# Altium PCB UKU100_001.PcbDoc (part 1 of 3)
Units mm, origin at the board's own origin, x right, y up, seen from the top; angles counter-clockwise.
Board outline 319.2 x 161.95 mm, 2 copper layers (Top Layer, Bottom Layer); 250 components, 337 nets, 871 pads, 490 vias.
Unrouted connection lines stored in the file: 3.
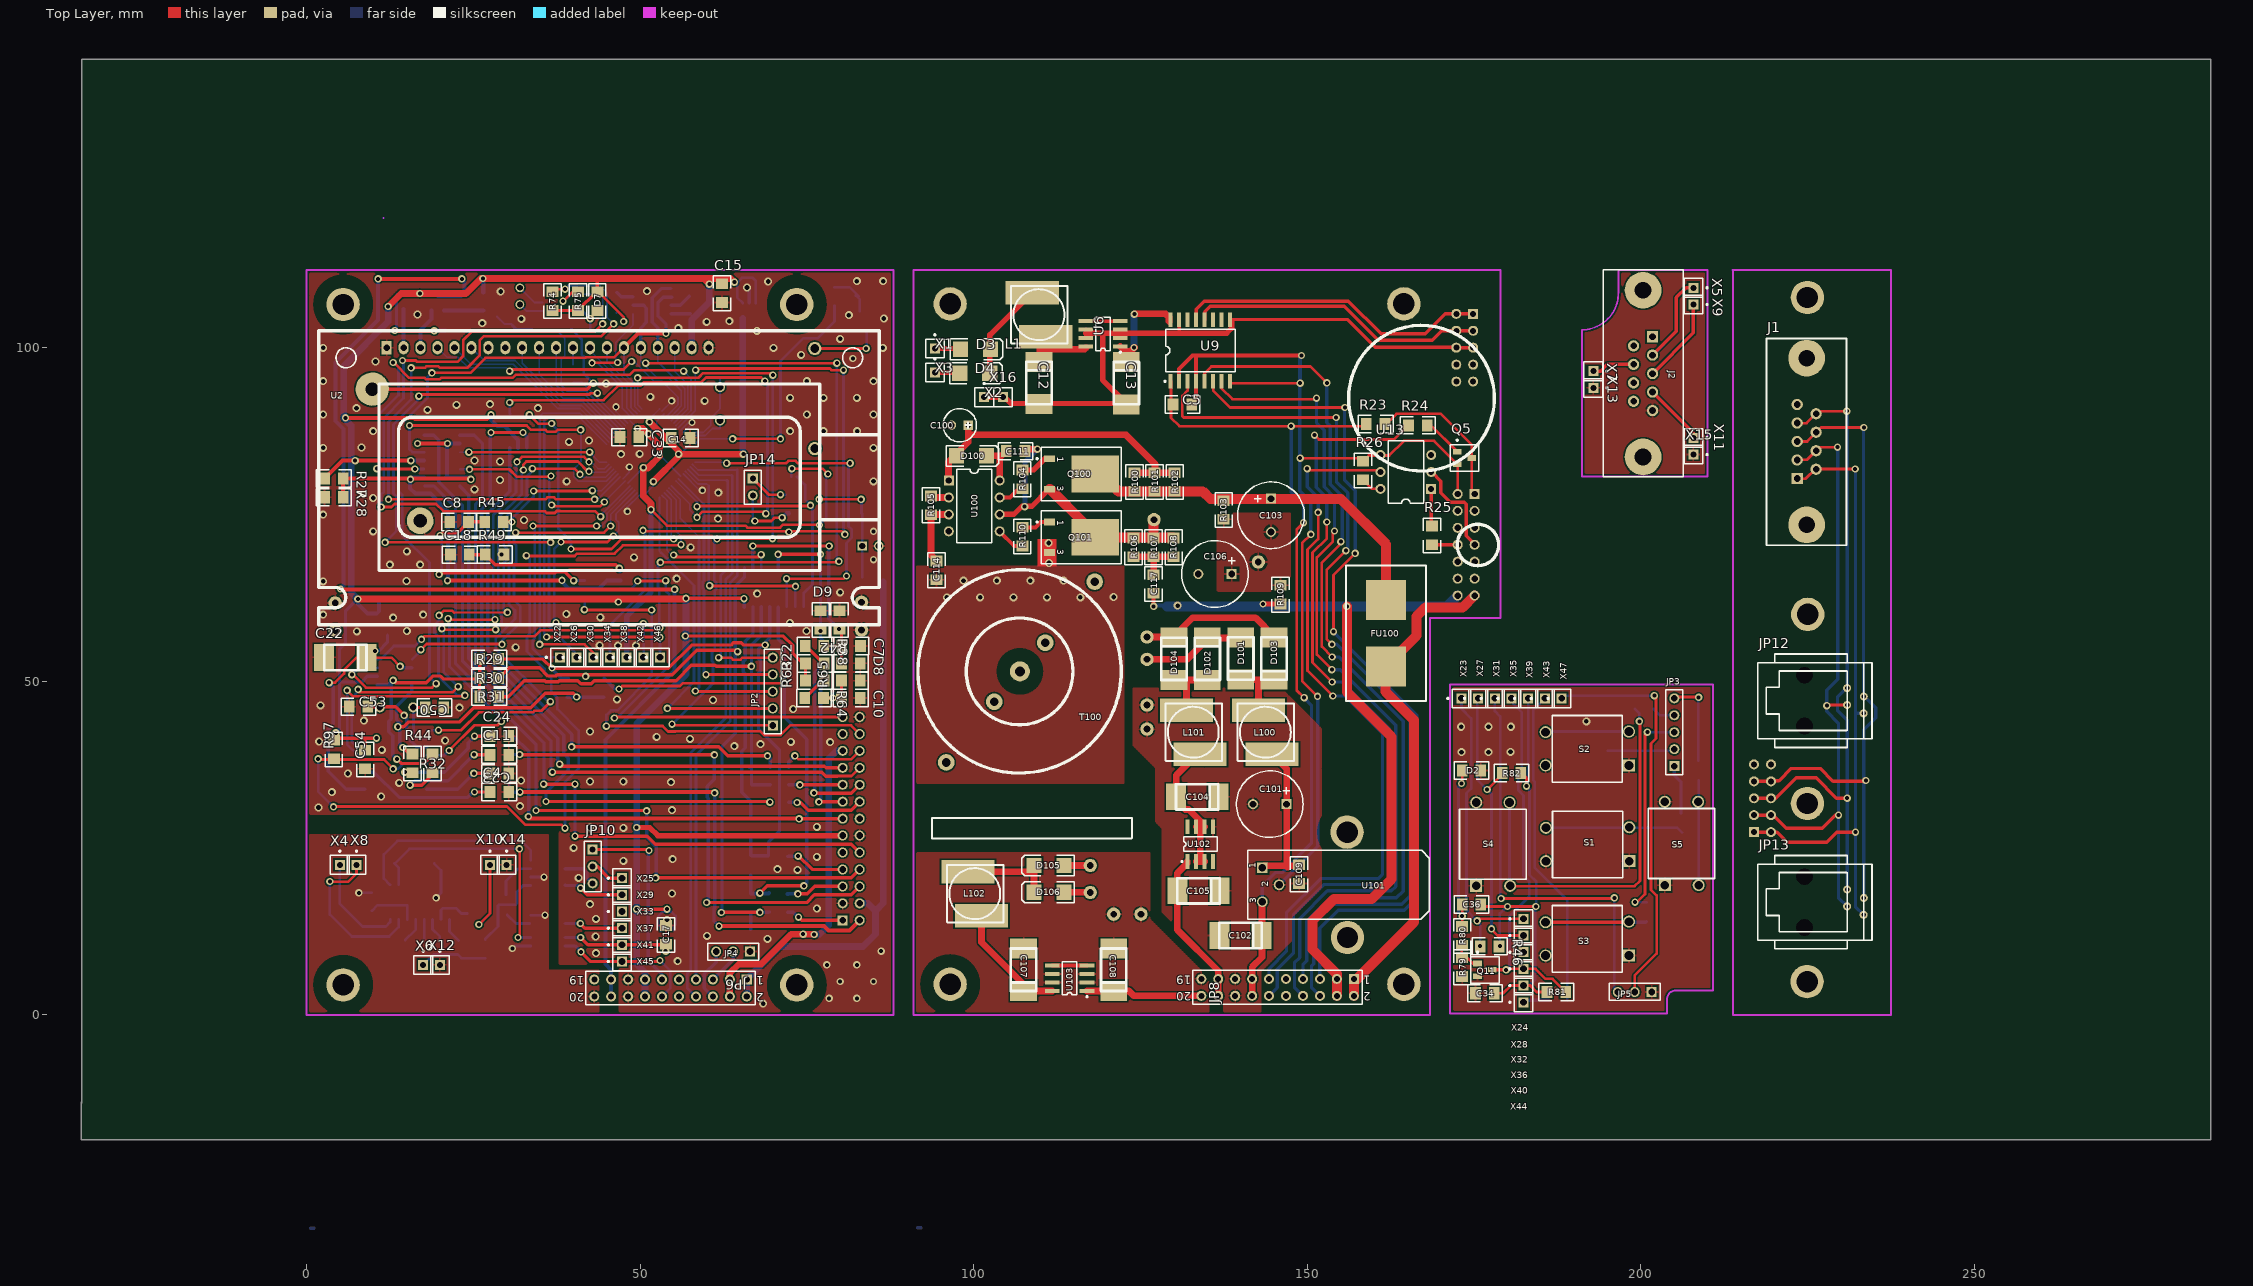
[diagram p0: Top Layer view]
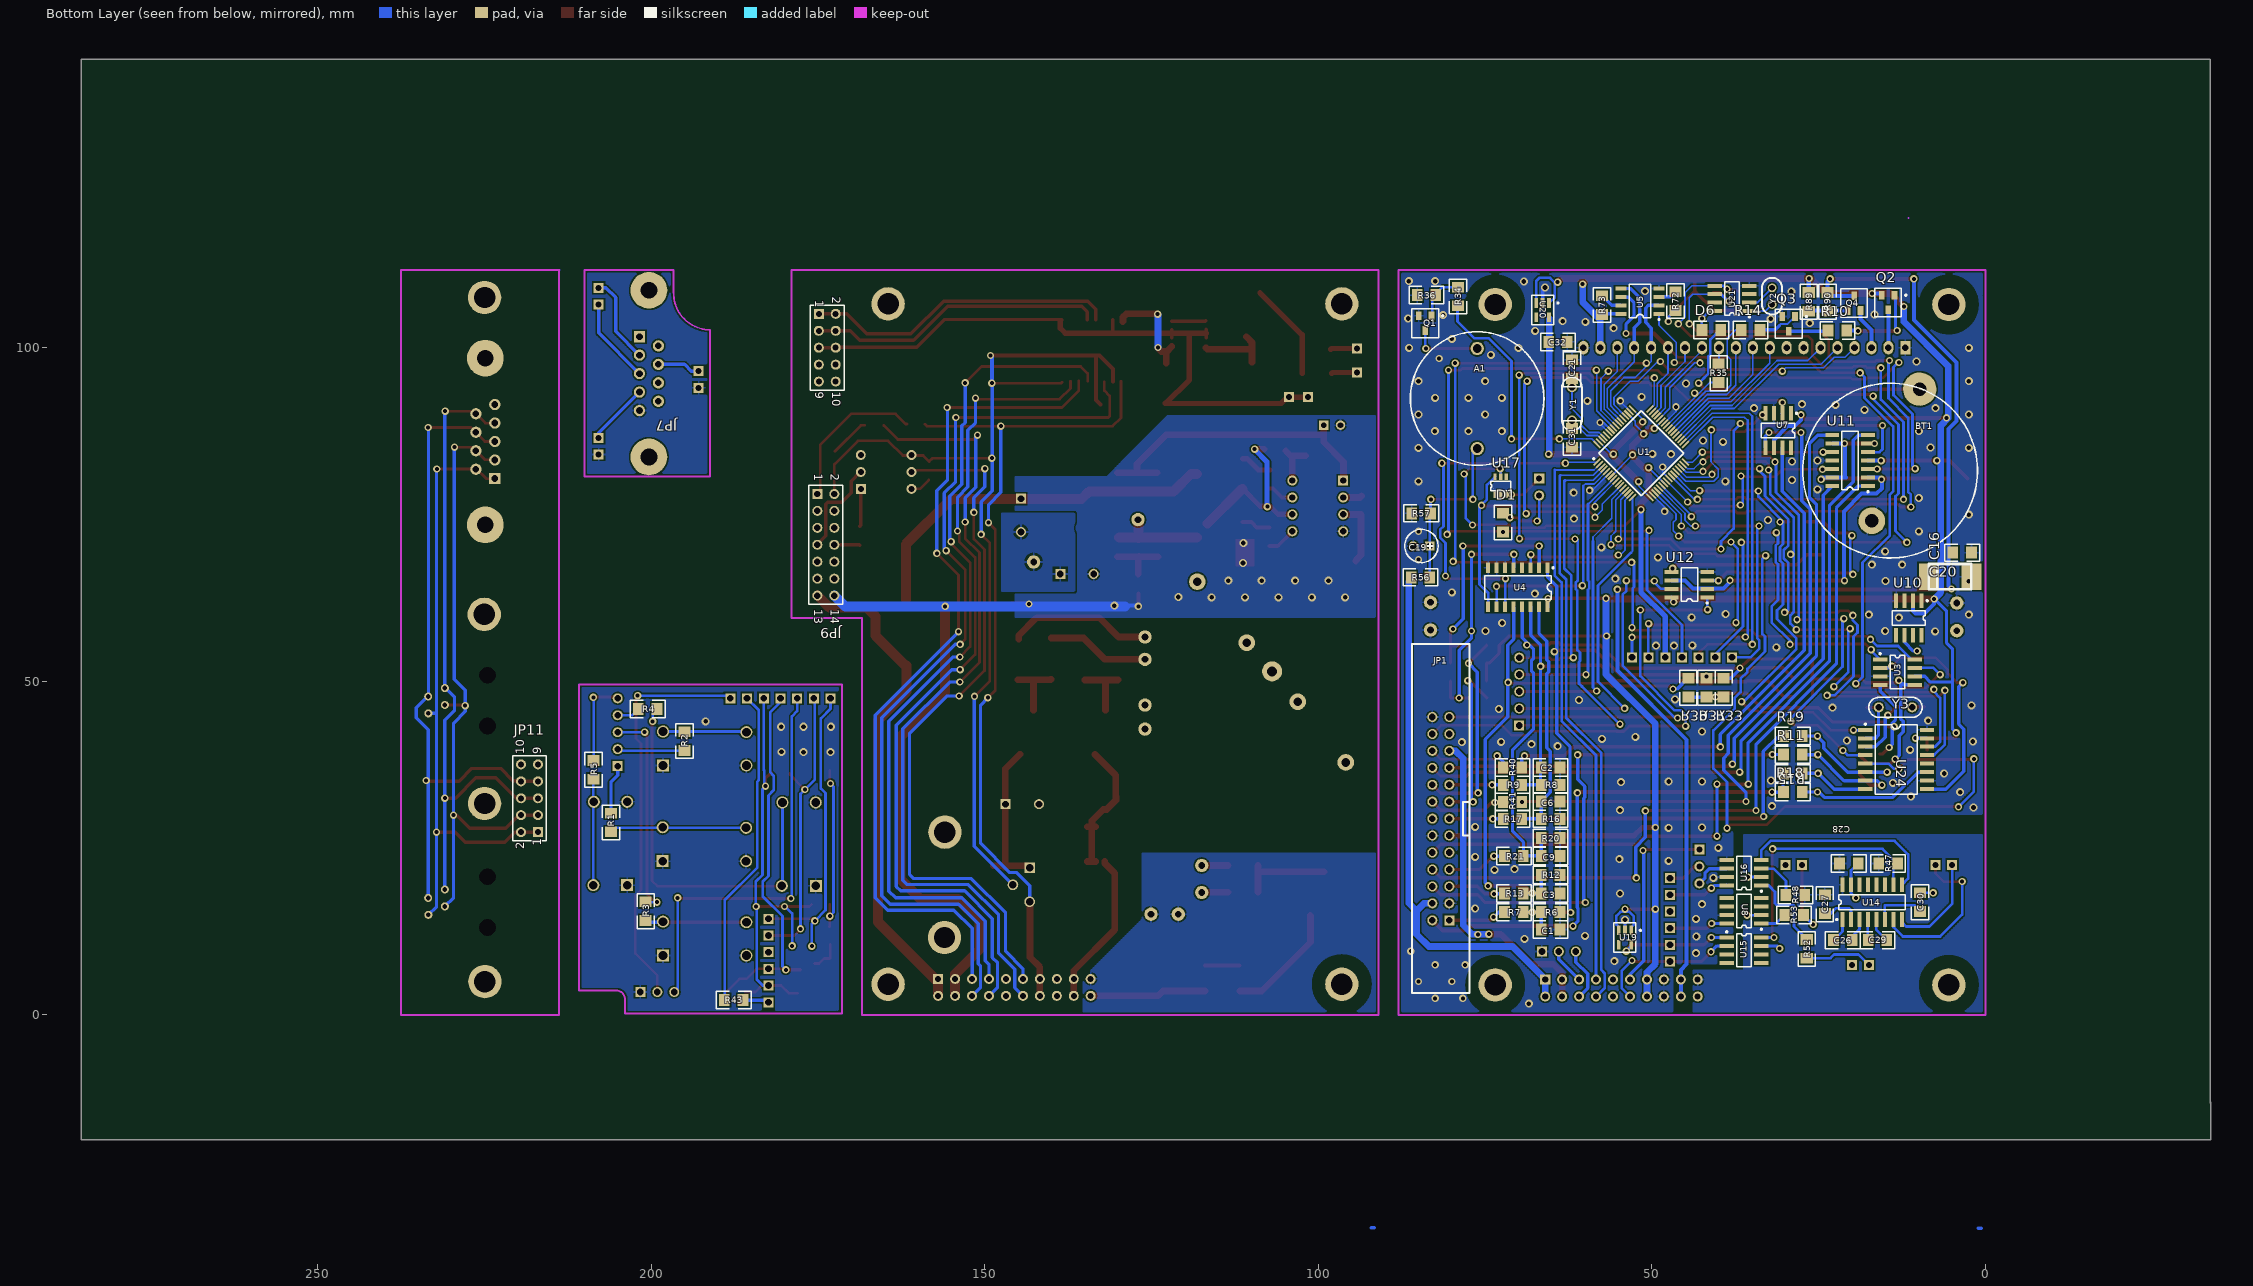
[diagram p1: Bottom Layer view, seen from below]

## Layer stack, top to bottom
Top Layer: signal copper 0.0356
Dielectric: dielectric 0.32, FR-4, Dk 4.8
Bottom Layer: signal copper 0.0356

## Board outline
-33.65,-13.25 -33.65,143.25 285.45,143.25 285.45,-18.7 -33.75,-18.7 -33.75,-13

## Design rules (kind name [scope] priority, off if disabled: settings)
Clearance Holes [InPoly vs HasPad('Free-0')] p1: gap=2
Clearance "Для LPC" [InComponent(U1)or
InNet(NetC21_2)or
InNet(NetC31_2)or
InNet(P0_0)or
InNet(P0_1)or
InNet(P0_2)or
InNet(P0_3)or
InNet(P0_4)or
InNet(P0_5)or
InNet(P0_6)or
InNet(P0_7)or
InNet(P0_8)or
InNet(P0_9)or
InNet(P0_10)or
InNet(P0_11)or
InNet(P0_12)or
InNet(P0_13)or
InNet(P0_14)or
InNet(P0_15)or
InNet(P0_16)or
InNet(P0_17)or
InNet(P0_18)or
InNet(P0_19)or
InNet(P0_20)or
InNet(P0_21)    or
InNet(P0_22)    or
InNet(P0_23)    or
InNet(P0_24)    or
InNet(P0_25)    or
InNet(P0_27)    or
InNet(P0_28)    or
InNet(P0_29)    or
InNet(P0_30)    or
InNet(P1_16)    or
InNet(P1_17)    or
InNet(P1_18)    or
InNet(P1_19)    or
InNet(P1_20)    or
InNet(P1_21)    or
InNet(P1_22)    or
InNet(P1_23)    or
InNet(P1_24)    or
InNet(P1_25)    or
InNet(P1_26)    or
InNet(P1_27)    or
InNet(P1_29)    or
InNet(P1_30)    or
InNet(P1_31)    or
InNet('+1V8')   or
InNet('+3V3')   or
(InNet(GND)and(not InPoly))      or
InNet(RES) vs InComponent(U1)or
InNet(NetC21_2)or
InNet(NetC31_2)or
InNet(P0_0)or
InNet(P0_1)or
InNet(P0_2)or
InNet(P0_3)or
InNet(P0_4)or
InNet(P0_5)or
InNet(P0_6)or
InNet(P0_7)or
InNet(P0_8)or
InNet(P0_9)or
InNet(P0_10)or
InNet(P0_11)or
InNet(P0_12)or
InNet(P0_13)or
InNet(P0_14)or
InNet(P0_15)or
InNet(P0_16)or
InNet(P0_17)or
InNet(P0_18)or
InNet(P0_19)or
InNet(P0_20)or
InNet(P0_21)    or
InNet(P0_22)    or
InNet(P0_23)    or
InNet(P0_24)    or
InNet(P0_25)    or
InNet(P0_27)    or
InNet(P0_28)    or
InNet(P0_29)    or
InNet(P0_30)    or
InNet(P1_16)    or
InNet(P1_17)    or
InNet(P1_18)    or
InNet(P1_19)    or
InNet(P1_20)    or
InNet(P1_21)    or
InNet(P1_22)    or
InNet(P1_23)    or
InNet(P1_24)    or
InNet(P1_25)    or
InNet(P1_26)    or
InNet(P1_27)    or
InNet(P1_29)    or
InNet(P1_30)    or
InNet(P1_31)    or
InNet('+1V8')   or
InNet('+3V3')   or
(InNet(GND)and(not InPoly))      or
InNet(RES)] p2: gap=0.1
Clearance [All] p3: gap=0.25
Clearance "Для разъёма и индикатора" [InComponent(JP1) or InComponent(U2)] p4: gap=0.3
Clearance Высоковольтное [InNet('+UOUT') or
InNet('U1') or
InNet('U2') or
InNet('UAKB') or
InNet('-UOUT') vs InPoly] p5: gap=0.6
Clearance Poly [InPoly] p6: gap=0.4
Clearance Poly_Poly [InPoly vs InPoly] p7: gap=1
Clearance Keep_Out [OnLayer('Keep-Out Layer')] p8: gap=0.7
ComponentClearance [All] p1: gap=0.254 collisioncheckmode=0
HoleSize [All] p1: absolutevalues=TRUE maxlimit=5 minlimit=0.025 maxpercent=80.000 minpercent=20.000
PolygonConnect [All] p1: connectstyle=Relief reliefconductorwidth=0.25 reliefentries=4 polygonreliefangle="90 Angle"
RoutingLayers [All] p1: top layer=Horizontal bottom layer=Vertical
RoutingVias [All] p1: holewidth=0.6 width=1.1 viastyle="Through Hole" minholewidth=0.6 minwidth=1.1 maxholewidth=0.7 maxwidth=1.2
SolderMaskExpansion [All] p1: expansion=0.102
TestPointUsage [All] p1: valid=0 allowmultiple=FALSE
Testpoint [All] p1: side=15 testpointundercomponent=TRUE minsize=1.016 maxsize=2.54 preferedsize=1.524 minholesize=0 maxholesize=1.016 preferedholesize=0.813 testpointgrid=0.025 style=1023 order=1234567890
Width [All] p1: maxlimit=2 minlimit=0.2 preferedwidth=0.254 toplayer_prefwidth=0.4 bottomlayer_prefwidth=0.5 minimp=50.000000 maximp=50.000000 favimp=50.000000
15 further rules are at their usual default settings.

## Classes and differential pairs
component class IBPV11: -IAKB A1 AIN3 AIN4 AIN4U AIN5 BT1 C0 C1 C2 C3 C4 C6 C7 C9 C10 C11 C14 C15 C16 C17 C19 C20 C21 C22 C23 C24 C31 C32 C33 C34 C36 C50 C53 C54 D2 D6 D7 D8 D9 I1+ I1- JP1 JP2 JP3 JP4 JP5 JP6 JP10 NetC25_1 NetC29_1 NetC29_2 NetC30_1 P0_19 Q1 Q2 Q3 Q4 Q11 R1 R2 R3 R4 R5 R6 R7 R8 R9 R10 R11 R12 R13 R14 R15 R16 R17 R18 R19 R20 R21 R22 R34 R35 R36 R38 R40 R41 R42 R43 R46 R56 R57 R63 R64 R65 R74 R75 R79 R80 R81 R82 R89 R90 R97 S1 S2 S3 S4 S5 U1 U2 U4 U7 U10 U19 U20 U21 U24 X22 X23 X24 X25 X26 X27 X28 X29 X30 X31 X32 X33 X34 X35 X36 X37 X38 X39 X40 X41 X42 X43 X44 X45 X46 X47 Y1 Y2 Y3
component class Designator: C5 C12 C13 C100 C101 C102 C103 C104 C105 C106 C107 C108 C109 C111 C114 C117 D3 D4 D100 D101 D102 D103 D104 D105 D106 FU100 J1 J4 JP7 JP8 JP9 JP11 JP12 JP13 L1 L100 L101 L102 Q5 Q100 Q101 R23 R24 R25 R26 R100 R101 R102 R103 R104 R105 R106 R107 R108 R109 R110 T100 U6 U9 U13 U100 U101 U102 U103 X1 X2 X3 X16

## Components (designator, comment, footprint, x,y, rotation, side; value= is the part's Value field where it differs from the comment)
A1 "PJEZO" Pjezo15 76.2,97.4 r270 bottom
BT1 "Battery" BAT_SUPP 14.3,81.6 r200 bottom
C1 "Cap Semi" C3216-1206#1 65.2,12.8 r180 bottom (schematic designator C4)
C2 "Cap Semi" C3216-1206#1 65.2,37.1 r180 bottom (schematic designator C5)
C3 "Cap Semi" C3216-1206#1 65.2,18.2 r180 bottom (schematic designator C6)
C4 "Cap Semi" _1206#1 28.9,33.4 r180 top
C5 "Cap Semi" C3216-1206#1 131.3,91.5 r0 top (schematic designator C?)
C6 "Cap Semi" C3216-1206#1 65.2,32 r180 bottom (schematic designator C7)
C7 "Cap Semi" _1206#2 81.65,55.3 r0 top
C8 "Cap Semi" _1206#1 22.9,73.9 r0 top
C9 "Cap Semi" C3216-1206#1 65.2,23.8 r180 bottom (schematic designator C8)
C10 "Cap Semi" C3216-1206#1 81.6,47.5 r0 top
C11 "Cap Semi" C3216-1206#1 28.9,39 r180 top (schematic designator C?)
C12 "Cap Pol1" CAP_EL_6_3#1 109.8,97.9 r270 top (schematic designator C?)
C13 "Cap Pol1" CAP_EL_6_3#2 122.9,97.9 r270 top (schematic designator C?)
C14 "Cap Semi" C3216-1206#1 56.1,86.5 r180 top
C15 "Cap Semi" C3216-1206#2 62.3,108.2 r90 top
C16 "Cap Semi" C3216-1206#2 3.5,69.3 r0 bottom
C17 "Cap Semi" C3216-1206#1 53.9,12 r270 top
C18 "Cap Semi" _1206#1 23,69 r0 top
C19 "Cap Pol1" el3#1 83.3,70.3 r0 bottom
C20 "Cap Pol3" cap_el_6_3#1 8.5,65.7 r180 bottom (schematic designator C8)
C21 "Cap Semi" C3216-1206#1 62,96.8 r270 bottom
C22 "Cap Pol3" cap_el_6_3#2 9,53.6 r180 top
C23 "Cap Semi" C3216-1206#1 28.9,36.2 r180 top (schematic designator C?)
C24 "Cap Semi" C3216-1206#1 28.9,41.8 r180 top
C26 "" C3216-1206#1 21.4,11.2 r0 bottom (schematic designator C27)
C27 "" _1206#3 24.1,16.6 r90 bottom (schematic designator C23)
C28 "" C3216-1206#1 20.5,22.7 r180 bottom (schematic designator C24)
C29 "" C3216-1206#1 16.2,11.2 r180 bottom (schematic designator C25)
C30 "" C3216-1206#1 9.8,16.9 r90 bottom (schematic designator C26)
C31 "Cap Semi" C3216-1206#1 62,86.5 r90 bottom
C32 "Cap Semi" C3216-1206#1 64.1,100.9 r0 bottom
C33 "Cap Semi" C3216-1206#2 48.4,86.6 r0 top
C34 "Cap Semi" C3216-1206#1 176.65,3.25 r0 top
C36 "Cap Semi" C3216-1206#1 174.65,16.55 r0 top
C50 "Cap Semi" _1206#2 19.2,46.1 r180 top
C53 "Cap Semi" _1206#2 7.8,46.2 r0 top
C54 "Cap Semi" C3216-1206#1 8.8,38.3 r90 top
C100 "Cap Pol1" el3#2 99.2,88.4 r180 top (schematic designator C?)
C101 "Cap Pol1" el5 141.9,31.6 r0 top (schematic designator C1)
C102 "Cap Pol1" CAP_EL_6_3#3 143.2,11.9 r180 top (schematic designator C2)
C103 "Cap Pol1" el5 144.6,72.4 r90 top (schematic designator C?)
C104 "Cap Pol1" CAP_EL_6_3#3 136.7,32.7 r180 top (schematic designator C4)
C105 "Cap Pol1" CAP_EL_6_3#3 136.9,18.6 r180 top (schematic designator C5)
C106 "Cap Pol1" el5 133.7,66.1 r0 top (schematic designator C?)
C107 "Cap Pol1" CAP_EL_6_3#3 107.5,3.6 r90 top (schematic designator C8)
C108 "Cap Pol1" CAP_EL_6_3#3 121,3.6 r90 top (schematic designator C9)
C109 "Cap Semi" C3216-1206#1 148.8,21.1 r90 top (schematic designator C10)
C111 "Cap Semi" C3216-1206#1 106.3,84.5 r0 top (schematic designator C12)
C114 "Cap Semi" C3216-1206#1 94.45,66.65 r270 top (schematic designator C15)
C117 "Cap Semi" C3216-1206#1 127,64.6 r270 top (schematic designator C18)
D1 "LL4148" _1206D 72.3,73.8 r270 bottom
D2 "LL4148" _1206d#1 174.65,36.65 r0 top
D3 "11BQ10" DSO-C2/X2.3 100.3,99.8 r0 top (schematic designator D?)
D4 "11BQ10" DSO-C2/X2.3 100.2,96.2 r0 top (schematic designator D?)
D6 "LL4148" _1206d#2 41.1,102.7 r180 bottom
D7 "LL4148" _1206d#1 43.6,107 r90 top
D8 "BZV55-C5V6" _1206d#3 81.6,52.7 r0 top
D9 "BZV55-C5V6" _1206d#3 77.1,59.2 r90 top
D100 "11BQ10" DSO-C2/X2.3 99.7,83.8 r0 top (schematic designator D3)
D101 "11BQ10" D_6_3 140.05,50.25 r90 top (schematic designator D1)
D102 "11BQ10" D_6_3 135.05,56.55 r270 top (schematic designator D2)
D103 "11BQ10" D_6_3 145.05,50.25 r90 top (schematic designator D4)
D104 "11BQ10" D_6_3 130.05,56.55 r270 top (schematic designator D5)
D105 "11BQ10" DSO-C2/X2.3 111.3,22.4 r180 top (schematic designator D6)
D106 "11BQ10" DSO-C2/X2.3 111.3,18.4 r180 top (schematic designator D7)
FU100 "FUSE" FUSE2 161.8,57.2 r90 top (schematic designator FU1)
J1 "D Connector 9" DSUB_N9 223.35,85.9 r90 top
J2 "D Connector 9" DSUB_N9 201.9,96.2 r270 top (schematic designator J1)
JP1 "MHDR2X13" SCM-26 81.6,29.4 r90 bottom (schematic designator JP?)
JP2 "Header 5" HDR1X5 69.9,43.4 r90 top (schematic designator JP3)
JP3 "Header 5" HDR1X5 205.05,37.3 r90 top (schematic designator JP2)
JP4 "Header 3" HDR1X3#1 66.5,9.5 r180 top (schematic designator JP?)
JP5 "Header 3" HDR1X3#1 201.65,3.45 r180 top (schematic designator JP?)
JP6 "Header 20" HDR2X10 66,5.3 r180 top (schematic designator JP?)
JP7 "Header 5X2" HDR2X5 174.9,105.1 r270 bottom (schematic designator JP?)
JP8 "Header 20" HDR2X10 157,5.4 r180 top
JP9 "Header 14H" HDR2X7 175.1,78.1 r270 bottom
JP10 "Header 3" HDR1X3#2 42.9,24.8 r270 top
JP11 "Header 5X2" HDR2X5 217,27.4 r90 bottom
JP12 "Header 4" tj3-4p4c 233.45,47.1 r90 top
JP13 "Header 4" tj3-4p4c 233.45,16.9 r90 top
JP14 "Header 2" HDR1X2 66.9,80.4 r270 top
L1 "Inductor Konstr 2" L10x10 104.7,99.9 r0 top (schematic designator L?)
L100 "Inductor Konstr 2" L10X10 138.65,37.3 r0 top (schematic designator L1)
L101 "Inductor Konstr 2" L10X10 127.85,37.3 r0 top (schematic designator L2)
L102 "Inductor Konstr 2" L10X10 95.1,13.1 r0 top (schematic designator L3)
Q1 "BC846" SO-G3#1 84,103.7 r0 bottom
Q2 "BC856" SO-G3#2 14.6,106.8 r0 bottom
Q3 "BC847" SO-G3#2 29.5,103.6 r0 bottom
Q4 "BC856" SO-G3#1 19.7,106.7 r180 bottom
Q5 "BC847" SO-G3#2 173.6,83.5 r270 top (schematic designator Q?)
Q11 "BC846" SO-G3#1 176.65,6.75 r270 top
Q100 "IRFR120" SIP-G3/E8 114.8,81.1 r270 top (schematic designator Q?)
Q101 "IRFR120" SIP-G3/E8 114.8,71.6 r270 top (schematic designator Q?)
R1 "Res2" _1206#3 206.05,28.85 r90 bottom (schematic designator R3)
R2 "Res2" _1206#3 195.05,41.05 r270 bottom (schematic designator R4)
R3 "Res2" _1206#3 200.85,15.55 r90 bottom (schematic designator R6)
R4 "Res2" _1206#3 200.55,45.85 r0 bottom (schematic designator R7)
R5 "Res2" _1206#3 208.65,36.75 r90 bottom (schematic designator R9)
R6 "Res2" _1206#3 65.2,15.4 r180 bottom (schematic designator R10)
R7 "Res2" _1206#3 70.7,15.4 r0 bottom (schematic designator R11)
R8 "Res2" _1206#3 65.2,34.5 r180 bottom (schematic designator R13)
R9 "Res2" _1206#3 70.9,34.5 r0 bottom (schematic designator R14)
R10 "Res2" _1206#1 22.2,102.6 r180 bottom
R11 "Res2" _1206#1 28.9,39 r0 bottom (schematic designator R?)
R12 "Res2" _1206#3 65.2,21 r180 bottom (schematic designator R17)
R13 "Res2" _1206#3 70.7,18.2 r0 bottom (schematic designator R18)
R14 "Res2" _1206#1 35.2,102.7 r180 bottom
R15 "Res2" _1206#1 28.9,36.2 r0 bottom (schematic designator R?)
R16 "Res2" _1206#3 65.2,29.4 r180 bottom (schematic designator R21)
R17 "Res2" _1206#3 70.9,29.4 r0 bottom (schematic designator R22)
R18 "Res2" _1206#1 28.9,33.4 r0 bottom
R19 "Res2" _1206#1 28.9,41.8 r0 bottom
R20 "Res2" _1206#3 65.2,26.5 r180 bottom (schematic designator R25)
R21 "Res2" _1206#3 70.7,23.8 r0 bottom (schematic designator R26)
R22 "Res2" _1206#2 76.2,52.7 r180 top
R23 "Res2" _1206#1 160.3,88.6 r0 top
R24 "Res2" _1206#1 166.6,88.4 r0 top
R25 "Res2" _1206#1 168.7,71.9 r90 top
R26 "Res2" _1206#1 158.4,81.6 r270 top
R27 "Res2" _1206#2 4.1,80.4 r0 top
R28 "Res2" _1206#2 4.1,77.6 r0 top
R29 "Res2" _1206#2 27.4,53.349 r180 top
R30 "Res2" _1206#2 27.4,50.5 r180 top
R31 "Res2" _1206#2 27.4,47.7 r180 top
R32 "Res2" _1206#2 18.9,37.7 r90 top
R33 "Res2" _1206#4 39.25,49.05 r270 bottom
R34 "Res2" _1206#3 79.1,107.7 r90 bottom (schematic designator R36)
R35 "Res2" _1206#3 40,96.2 r90 bottom
R36 "Res2" _1206#3 83.8,107.9 r180 bottom (schematic designator R16)
R37 "Res2" _1206#4 41.85,49.05 r270 bottom
R38 "Res2" _1206#2 76.15,55.3 r0 top
R39 "Res2" _1206#4 44.55,49.05 r270 bottom
R40 "Res2" _1206#3 70.9,37.1 r180 bottom (schematic designator R42)
R41 "Res2" _1206#3 70.9,31.9 r180 bottom (schematic designator R20)
R42 "Res2" _1206#2 79.9,59.2 r270 top
R43 "Res2" _1206#3 187.65,2.25 r180 bottom (schematic designator R42)
R44 "Res2" _1206#2 15.9,37.7 r90 top
R45 "Res2" _1206#1 28.1,73.9 r180 top
R46 "Res2" _1206#5 177.4,10.3 r0 top
R47 "Res2" _1206#3 14.6,22.7 r180 bottom (schematic designator R65)
R48 "Res2" _1206#3 28.5,18 r180 bottom (schematic designator R45)
R49 "Res2" _1206#1 28.2,69 r180 top
R52 "Res2" _1206#3 26.8,9.9 r270 bottom (schematic designator R67)
R53 "Res2" _1206#3 28.7,15 r180 bottom (schematic designator R68)
R56 "Res2" _1206#3 84.7,65.6 r0 bottom
R57 "Res2" _1206#3 84.6,75.2 r180 bottom
R63 "Res2" _1206#2 76.2,50.1 r180 top
R64 "Res2" _1206#2 76.1,47.5 r0 top
R65 "Res2" _1206#2 81.6,50.1 r180 top
R72 "Res2" _1206#3 46.5,107 r270 bottom
R73 "Res2" _1206#3 57.5,106.4 r90 bottom
R74 "Res2" _1206#3 36.9,107 r270 top
R75 "Res2" _1206#3 40.7,107 r270 top
R79 "Res2" _1206#3 173.25,7.15 r90 top
R80 "Res2" _1206#3 173.25,11.85 r90 top
R81 "Res2" _1206#3 187.35,3.45 r0 top (schematic designator R?)
R82 "Res2" _1206#3 180.65,36.25 r180 top
R89 "Res2" _1206#3 26.5,106.9 r90 bottom
R90 "Res2" _1206#3 23.7,106.9 r270 bottom
R97 "Res2" _1206#2 4.1,39.8 r90 top
R100 "Res2" _1206#3 124.149,79.9 r90 top (schematic designator R1)
R101 "Res2" _1206#3 127.15,79.9 r90 top (schematic designator R2)
R102 "Res2" _1206#3 130.15,79.9 r90 top (schematic designator R3)
R103 "Res2" _1206#3 137.5,75.7 r270 top (schematic designator R4)
R104 "Res2" _1206#3 107.3,80.3 r90 top (schematic designator R5)
R105 "Res2" _1206#3 93.6,76.4 r90 top (schematic designator R6)
R106 "Res2" _1206#3 124,70.1 r270 top (schematic designator R9)
R107 "Res2" _1206#3 127,70.1 r270 top (schematic designator R8)
R108 "Res2" _1206#3 130,70.1 r270 top (schematic designator R7)
R109 "Res2" _1206#3 146,63 r270 top (schematic designator R10)
R110 "Res2" _1206#3 107.3,71.7 r90 top (schematic designator R11)
S1 "" SWT-9 198.3,23.05 r180 top
S2 "" SWT-9 198.25,37.4 r180 top
S3 "" SWT-9 198.25,8.9 r180 top
S4 "" SWT-9 175.35,19.35 r90 top
S5 "" SWT-9 203.62,19.45 r90 top
T100 "TRANS_RING1" trans_ring1 106.9,51.5 r180 top (schematic designator T1)
U1 "" F-QFP10X10-G64/P.5N 51.6,84.2 r135 bottom
U2 "AG1232G" AG1232G 43.9,80.6 r0 top (schematic designator U4)
U3 "TLV2542" SO-G8 13.2,51.4 r270 bottom (schematic designator U6)
U4 "MC14051BD" SO-G16/C5.85 70.1,64.1 r0 bottom
U5 "25LC640" SO-G8/D5 51.8,107 r90 bottom
U6 "MC78L05ACD" SO-G8 119.4,102.1 r90 top (schematic designator U?)
U7 "UCC37324" SO-G8 31.1,87.6 r0 bottom
U8 "MOCD217" SO-G8 36.2,15.6 r90 bottom
U9 "ADM2483" SO-G16/D10.4 134,99.6 r0 top (schematic designator U?)
U10 "REF198GS" SO-G8 11.5,59.5 r0 bottom
U11 "LM324AD" SO-G14/G3.3 20.3,83.1 r90 bottom
U12 "LM358DR" SO-G8/E2.5 44.4,64.5 r90 bottom
U13 "4N35" DIP-6 164.8,81.4 r90 top
U14 "MAX232ESE" SO-G16 17,16.9 r180 bottom
U15 "MOCD217" SO-G8 36.2,9.7 r270 bottom
U16 "MOCD217" SO-G8 36.2,21.3 r90 bottom
U17 "PIC10F200/202" "SOT23 - 6" 72.7,79.3 r180 bottom
U19 "TPS76333" SO-G5/P.95 54.05,11.6 r0 bottom
U20 "TPS76318" SO-G5/P.95 66.4,105.65 r0 bottom
U21 "PCF8563" SO-G8 38,107.4 r90 bottom
U24 "AD7705" SO-G16/D10.4 13.4,38.3 r270 bottom
U100 "IR2155" DIP-8/D11 100.1,76.3 r270 top (schematic designator U?)
U101 "7805" 7805_1 143.3,19.5 r270 top (schematic designator U1)
U102 "L79L05ACD" SO-G8 134,25.6 r0 top (schematic designator U3)
U103 "MC78L05ACD" SO-G8 114.4,5.5 r90 top (schematic designator U4)
X1 "" PIN1#1 94.2,99.9 r0 top (schematic designator X?)
X2 "" PIN1#1 101.6,92.6 r0 top (schematic designator X?)
X3 "" PIN1#1 94.2,96.3 r0 top (schematic designator X?)
X4 "" PIN1#1 5,22.5 r0 top (schematic designator X?)
X5 "" PIN1#1 207.9,109 r270 top (schematic designator X?)
X6 "" PIN1#1 17.5,7.5 r0 top (schematic designator X?)
X7 "" PIN1#1 192.9,96.5 r270 top (schematic designator X?)
X8 "" PIN1#1 7.5,22.5 r0 top (schematic designator X?)
X9 "" PIN1#1 207.9,106.5 r270 top (schematic designator X?)
X10 "" PIN1#1 27.5,22.5 r0 top (schematic designator X?)
X11 "" PIN1#1 207.9,86.5 r270 top (schematic designator X?)
X12 "" PIN1#1 20,7.5 r0 top (schematic designator X?)
X13 "" PIN1#1 192.9,94 r270 top (schematic designator X?)
X14 "" PIN1#1 30,22.5 r0 top
X15 "" PIN1#1 207.9,84 r270 top
X16 "" PIN1#1 104.4,92.6 r90 top
X22 "" PIN1#2 38,53.6 r90 top
X23 "" PIN1#2 173.15,47.45 r90 top
X24 "" PIN1#2 182.45,14.4 r90 top
X25 "" PIN1#2 47.3,20.5 r90 top
X26 "" PIN1#2 40.5,53.6 r90 top
X27 "" PIN1#2 175.65,47.45 r90 top
X28 "" PIN1#2 182.45,11.9 r90 top
X29 "" PIN1#2 47.3,18 r90 top
X30 "" PIN1#2 43,53.6 r90 top
X31 "" PIN1#2 178.15,47.45 r90 top
X32 "" PIN1#2 182.45,9.4 r90 top
X33 "" PIN1#2 47.3,15.5 r90 top
X34 "" PIN1#2 45.5,53.6 r90 top
X35 "" PIN1#2 180.65,47.45 r90 top
X36 "" PIN1#2 182.45,6.9 r90 top
X37 "" PIN1#2 47.3,13 r90 top
X38 "" PIN1#2 48,53.6 r90 top
X39 "" PIN1#2 183.15,47.45 r90 top
X40 "" PIN1#2 182.45,4.4 r90 top
X41 "" PIN1#2 47.3,10.5 r90 top
X42 "" PIN1#2 50.5,53.6 r90 top
X43 "" PIN1#2 185.65,47.45 r90 top
X44 "" PIN1#2 182.45,1.9 r90 top
X45 "" PIN1#2 47.3,8 r90 top
X46 "" PIN1#2 53,53.6 r90 top
X47 "" PIN1#2 188.15,47.45 r90 top
Y1 "10MGz" QWARZ1#1 62,94.1 r270 bottom
Y2 "32768" QWARZ2 32,109 r270 bottom
Y3 "4,9152MGz" QWARZ1#2 16,46.1 r180 bottom (schematic designator Y?)

## Footprints (in the part's own frame and the unit in brackets; to place one, negate y for a bottom-side part, rotate by r counter-clockwise, add the part's x,y. Pads: shape width x height; smd on the part's side, far side on the other; paste and mask are expansions set on the pad)
7805_1 [mm]
  rect 1.6x1.6 hole 1.1: 1(-2.54,0)
  round 1.6 hole 1.1: 2(0,2.5) 3(2.54,0)
  silkscreen extent -5.15,-2.2 5.15,25
_1206#1 [mm]
  rect 1.6x1.8 smd: 1(-1.412,-0.007) 2(1.388,-0.007)
  silkscreen extent -2.61,-1.31 2.59,1.29
_1206#2 [mm]
  rect 1.6x1.8 smd: 1(-1.397,0.003) 2(1.403,0.003)
  silkscreen extent -2.6,-1.3 2.6,1.3
_1206#3 [mm]
  rect 1.6x1.8 smd: 1(-1.4,0) 2(1.4,0)
  silkscreen extent -2.6,-1.3 2.6,1.3
_1206#4 [mm]
  rect 1.6x1.8 smd: 1(-1.397,-0.003) 2(1.403,-0.003)
  silkscreen extent -2.6,-1.3 2.6,1.3
_1206#5 [mm]
  rect 1.6x1.8 smd: 1(-1.421,-0.006) 2(1.379,-0.006)
  silkscreen extent -2.62,-1.31 2.58,1.29
_1206D [mm]
  rect 1.6x1.8 smd: 1(1.395,-0.009) 2(-1.405,-0.009)
  silkscreen extent -2.6,-1.31 2.6,1.29
_1206d#1 [mm]
  rect 1.6x1.8 smd: 1(1.4,0) 2(-1.4,0)
  silkscreen extent -2.6,-1.3 2.6,1.3
_1206d#2 [mm]
  rect 1.6x1.8 smd: 1(1.395,-0.009) 2(-1.405,-0.009)
  silkscreen extent -2.6,-1.31 2.6,1.29
_1206d#3 [mm]
  rect 1.6x1.8 smd: 1(1.405,0.012) 2(-1.395,0.012)
  silkscreen extent -2.6,-1.29 2.6,1.31
AG1232G [mm]
  rect 1.5x2 hole 1: 1(-31.877,19.431)
  oval 1.5x2 hole 1: 2(-29.337,19.431) 3(-26.797,19.431) 4(-24.257,19.431) 5(-21.717,19.431) 6(-19.177,19.431) 7(-16.637,19.431) 8(-14.097,19.431) 9(-11.557,19.431) 10(-9.017,19.431) 11(-6.477,19.431) 12(-3.937,19.431) 13(-1.397,19.431) 14(1.143,19.431) 15(3.683,19.431) 16(6.223,19.431) 17(8.763,19.431) 18(11.303,19.431) 19(13.843,19.431) 20(16.383,19.431)
  silkscreen extent -42.04,-22.1 41.96,21.97
BAT_SUPP [mm]
  round 5 hole 2: 1(0,13)
  round 4 hole 2: 2(0,-8)
  silkscreen extent -13.1,-13.1 13.1,13.1
C3216-1206#1 [mm]
  rect 1.6x1.8 smd: 1(-1.4,0) 2(1.4,0)
  silkscreen extent -2.6,-1.3 2.6,1.3
C3216-1206#2 [mm]
  rect 1.6x1.8 smd: 1(-1.402,0.006) 2(1.398,0.006)
  silkscreen extent -2.6,-1.29 2.6,1.31
CAP_EL_6_3#1 [mm]
  rect 3x4 smd: 1(-0.011,0.006) 2(6.339,0.006)
  silkscreen extent -0.01,-1.9 6.34,1.91
CAP_EL_6_3#2 [mm]
  rect 3x4 smd: 1(0.011,-0.002) 2(6.361,-0.002)
  silkscreen extent 0.01,-1.91 6.36,1.9
CAP_EL_6_3#3 [mm]
  rect 3x4 smd: 1(0,0) 2(6.35,0)
  silkscreen extent 0,-1.91 6.35,1.91
cap_el_6_3#1 [mm]
  rect 3x4 smd: 1(0.011,-0.002) 2(6.361,-0.002)
  silkscreen extent 0.01,-1.91 6.36,1.9
cap_el_6_3#2 [mm]
  rect 3x4 smd: 1(-0.011,0.006) 2(6.339,0.006)
  silkscreen extent -0.01,-1.9 6.34,1.91
D_6_3 [mm]
  rect 3x4 smd: 1(6.35,0) 2(0,0)
  silkscreen extent 0,-1.91 6.35,1.91
DIP-6 [mm]
  rect 1.5x1.5 hole 0.9: 1(-2.54,-3.81)
  round 1.5 hole 0.9: 2(0,-3.81) 3(2.54,-3.81) 4(2.54,3.81) 5(0,3.81) 6(-2.54,3.81)
  silkscreen extent -4.7,-2.65 4.7,2.65
DIP-8/D11 [mm]
  rect 1.5x1.5 hole 0.95: 1(-3.81,-3.81)
  round 1.5 hole 0.95: 2(-1.27,-3.81) 3(1.27,-3.81) 4(3.81,-3.81) 5(3.81,3.81) 6(1.27,3.81) 7(-1.27,3.81) 8(-3.81,3.81)
  silkscreen extent -5.5,-2.65 5.5,2.65
DSO-C2/X2.3 [mm]
  rect 2.3x2.3 smd: 1(-2.25,0) 2(2.25,0)
  silkscreen extent -3.8,-1.55 4.1,1.55
DSUB_N9 [mm]
  rect 1.69x1.69 hole 1: 1(-5.481,-0.116)
  round 1.69 hole 1: 2(-2.711,-0.116) 3(0.059,-0.116) 4(2.829,-0.116) 5(5.599,-0.116) 6(-4.096,-2.956) 7(-1.326,-2.956) 8(1.444,-2.956) 9(4.214,-2.956)
  round 5.5 hole 2.5: 10(-12.436,-1.536) 11(12.554,-1.536)
  silkscreen extent -15.49,-7.51 15.51,4.49
el3#1 [mm]
  rect 1.4x1.4 hole 0.95: 1(0,0)
  round 1.4 hole 0.95: 2(2.5,0)
  silkscreen extent -1.25,-2.5 3.75,2.5
el3#2 [mm]
  rect 1.4x1.4 hole 0.85: 1(0.011,-0.008)
  round 1.4 hole 0.85: 2(2.511,-0.008)
  silkscreen extent -1.24,-2.51 3.76,2.49
el5 [mm]
  rect 1.5x1.5 hole 1: 1(5,0)
  round 1.5 hole 1: 2(0,0)
  silkscreen extent -2.5,-5 7.5,5
F-QFP10X10-G64/P.5N [mm]
  rect 1.45x0.3 smd: 1(-5.625,3.75) 2(-5.625,3.25) 3(-5.625,2.75) 4(-5.625,2.25) 5(-5.625,1.75) 6(-5.625,1.25) 7(-5.625,0.75) 8(-5.625,0.25) 9(-5.625,-0.25) 10(-5.625,-0.75) 11(-5.625,-1.25) 12(-5.625,-1.75) 13(-5.625,-2.25) 14(-5.625,-2.75) 15(-5.625,-3.25) 16(-5.625,-3.75) 33(5.625,-3.75) 34(5.625,-3.25) 35(5.625,-2.75) 36(5.625,-2.25) 37(5.625,-1.75) 38(5.625,-1.25) 39(5.625,-0.75) 40(5.625,-0.25) 41(5.625,0.25) 42(5.625,0.75) 43(5.625,1.25) 44(5.625,1.75) 45(5.625,2.25) 46(5.625,2.75) 47(5.625,3.25) 48(5.625,3.75)
  rect 0.3x1.45 smd: 17(-3.75,-5.625) 18(-3.25,-5.625) 19(-2.75,-5.625) 20(-2.25,-5.625) 21(-1.75,-5.625) 22(-1.25,-5.625) 23(-0.75,-5.625) 24(-0.25,-5.625) 25(0.25,-5.625) 26(0.75,-5.625) 27(1.25,-5.625) 28(1.75,-5.625) 29(2.25,-5.625) 30(2.75,-5.625) 31(3.25,-5.625) 32(3.75,-5.625) 49(3.75,5.625) 50(3.25,5.625) 51(2.75,5.625) 52(2.25,5.625) 53(1.75,5.625) 54(1.25,5.625) 55(0.75,5.625) 56(0.25,5.625) 57(-0.25,5.625) 58(-0.75,5.625) 59(-1.25,5.625) 60(-1.75,5.625) 61(-2.25,5.625) 62(-2.75,5.625) 63(-3.25,5.625) 64(-3.75,5.625)
  silkscreen extent -5.75,-4.5 4.5,4.57
FUSE2 [mm]
  rect 6x6 smd: 1(-5,0) 2(5,0)
  silkscreen extent -10.16,-6 10.16,6
HDR1X2 [mm]
  rect 1.5x1.5 hole 0.9: 1(0,0)
  round 1.5 hole 0.9: 2(2.54,0)
  silkscreen extent -1.27,-1.27 3.81,1.27
HDR1X3#1 [mm]
  rect 1.5x1.5 hole 1: 1(0,0)
  round 1.5 hole 1: 2(2.54,0) 3(5.08,0)
  silkscreen extent -1.27,-1.27 6.35,1.27
HDR1X3#2 [mm]
  rect 1.5x1.5 hole 0.9: 1(0,0)
  round 1.5 hole 0.9: 2(2.54,0) 3(5.08,0)
  silkscreen extent -1.27,-1.27 6.35,1.27
HDR1X5 [mm]
  rect 1.5x1.5 hole 1: 1(0,0)
  round 1.5 hole 1: 2(2.54,0) 3(5.08,0) 4(7.62,0) 5(10.16,0)
  silkscreen extent -1.27,-1.27 11.43,1.27
HDR2X5 [mm]
  rect 1.5x1.5 hole 0.9: 1(0,0)
  round 1.5 hole 0.9: 2(0,2.54) 3(2.54,0) 4(2.54,2.54) 5(5.08,0) 6(5.08,2.54) 7(7.62,0) 8(7.62,2.54) 9(10.16,0) 10(10.16,2.54)
  silkscreen extent -1.27,-1.27 11.43,3.81
HDR2X7 [mm]
  rect 1.5x1.5 hole 0.95: 1(0,-0.01)
  round 1.5 hole 0.95: 2(0,2.53) 3(2.54,-0.01) 4(2.54,2.53) 5(5.08,-0.01) 6(5.08,2.53) 7(7.62,-0.01) 8(7.62,2.53) 9(10.16,-0.01) 10(10.16,2.53) 11(12.7,-0.01) 12(12.7,2.53) 13(15.24,-0.01) 14(15.24,2.53)
  silkscreen extent -1.27,-1.28 16.51,3.8
HDR2X10 [mm]
  rect 1.5x1.5 hole 0.9: 1(0,0)
  round 1.5 hole 0.9: 2(0,2.54) 3(2.54,0) 4(2.54,2.54) 5(5.08,0) 6(5.08,2.54) 7(7.62,0) 8(7.62,2.54) 9(10.16,0) 10(10.16,2.54) 11(12.7,0) 12(12.7,2.54) 13(15.24,0) 14(15.24,2.54) 15(17.78,0) 16(17.78,2.54) 17(20.32,0) 18(20.32,2.54) 19(22.86,0) 20(22.86,2.54)
  silkscreen extent -1.27,-1.27 24.13,3.81
L10x10 [mm]
  rect 8x3.5 smd: 1(4.075,8.372) 2(6.107,1.768)
  silkscreen extent 0.9,0.75 9.41,9.39
L10X10 [mm]
  rect 8x3.5 smd: 1(4.064,8.382) 2(6.096,1.778)
  silkscreen extent 0.89,0.76 9.4,9.4
PIN1#1 [mm]
  rect 1.5x1.5 hole 0.9: 1(0,0)
  silkscreen extent -1.4,-1.4 1.4,2.17
PIN1#2 [mm]
  rect 1.5x1.5 hole 1: 1(0,0)
  silkscreen extent -1.4,-1.4 1.4,2.17
Pjezo15 [mm]
  round 2 hole 1.3: 1(-2.5,0) 2(12.5,0)
  silkscreen extent -5.01,-10.01 15.01,10.01
QWARZ1#1 [mm]
  round 1.5 hole 1: 1(0,0) 2(5,0)
  silkscreen extent -1.5,-1.5 6.5,1.5
QWARZ1#2 [mm]
  round 1.5 hole 1: 1(0.004,0.011) 2(5.004,0.011)
  silkscreen extent -1.49,-1.49 6.5,1.51
QWARZ2 [mm]
  round 1.3 hole 0.85: 1(0,0) 2(2.5,0)
  silkscreen extent -1.5,-1.5 4,1.5
SCM-26 [mm]
  rect 1.5x1.5 hole 1: 1(-15.215,-1.22)
  round 1.5 hole 1: 2(-15.215,1.32) 3(-12.675,-1.22) 4(-12.675,1.32) 5(-10.135,-1.22) 6(-10.135,1.32) 7(-7.595,-1.22) 8(-7.595,1.32) 9(-5.055,-1.22) 10(-5.055,1.32) 11(-2.515,-1.22) 12(-2.515,1.32) 13(0.025,-1.22) 14(0.025,1.32) 15(2.565,-1.22) 16(2.565,1.32) 17(5.105,-1.22) 18(5.1,1.325) 19(7.645,-1.22) 20(7.645,1.32) 21(10.185,-1.22) 22(10.185,1.32) 23(12.725,-1.22) 24(12.725,1.32) 25(15.265,-1.22) 26(15.25,1.325)
  silkscreen extent -26.13,-4.25 26.19,4.35
SIP-G3/E8 [mm]
  rect 1x1.6 smd: 1(-2.285,-3.425) 3(2.285,-3.425)
  rect 5.5x7.1 smd: 4(0,3.425)
  silkscreen extent -4,-5.4 4,7.38
SO-G3#1 [mm]
  rect 0.85x1.3 smd: 1(-0.95,-1.1) 2(0.95,-1.1) 3(0,1.1)
  silkscreen extent -2.77,-2.15 2,2.15
SO-G3#2 [mm]
  rect 0.85x1.3 smd: 1(-0.948,-1.102) 2(0.952,-1.102) 3(0.002,1.098)
  silkscreen extent -2.77,-2.15 2,2.15
SO-G5/P.95 [mm]
  rect 0.55x1.45 smd: 1(-0.95,-1.075) 2(0,-1.075) 3(0.95,-1.075) 4(0.95,1.075) 5(-0.95,1.075)
  silkscreen extent -2.42,-2.2 1.65,2.2
SO-G8 [mm]
  rect 0.6x2.2 smd: 1(-1.905,-2.6) 2(-0.635,-2.6) 3(0.635,-2.6) 4(1.905,-2.6) 5(1.905,2.6) 6(0.635,2.6) 7(-0.635,2.6) 8(-1.905,2.6)
  silkscreen extent -2.88,-2.72 2.5,1.1
SO-G8/D5 [mm]
  rect 0.6x1.7 smd: 1(-1.905,-2.85) 2(-0.635,-2.85) 3(0.635,-2.85) 4(1.905,-2.85) 5(1.905,2.85) 6(0.635,2.85) 7(-0.635,2.85) 8(-1.905,2.85)
  silkscreen extent -2.88,-2.97 2.5,1.6
SO-G8/E2.5 [mm]
  rect 0.6x2.05 smd: 1(-1.905,-2.675) 2(-0.635,-2.675) 3(0.635,-2.675) 4(1.905,-2.675) 5(1.905,2.675) 6(0.635,2.675) 7(-0.635,2.675) 8(-1.905,2.675)
  silkscreen extent -2.88,-2.8 2.5,1.25
SO-G14/G3.3 [mm]
  rect 0.6x2.05 smd: 1(-3.81,-2.675) 2(-2.54,-2.675) 3(-1.27,-2.675) 4(0,-2.675) 5(1.27,-2.675) 6(2.54,-2.675) 7(3.81,-2.675) 8(3.81,2.675) 9(2.54,2.675) 10(1.27,2.675) 11(0,2.675) 12(-1.27,2.675) 13(-2.54,2.675) 14(-3.81,2.675)
  silkscreen extent -4.78,-2.8 4.38,1.25
SO-G16 [mm]
  rect 0.6x2.2 smd: 1(-4.445,-2.6) 2(-3.175,-2.6) 3(-1.905,-2.6) 4(-0.635,-2.6) 5(0.635,-2.6) 6(1.905,-2.6) 7(3.175,-2.6) 8(4.445,-2.6) 9(4.445,2.6) 10(3.175,2.6) 11(1.905,2.6) 12(0.635,2.6) 13(-0.635,2.6) 14(-1.905,2.6) 15(-3.175,2.6) 16(-4.445,2.6)
  silkscreen extent -5.42,-2.72 5,1.1
SO-G16/C5.85 [mm]
  rect 0.6x1.55 smd: 1(-4.445,-2.925) 2(-3.175,-2.925) 3(-1.905,-2.925) 4(-0.635,-2.925) 5(0.635,-2.925) 6(1.905,-2.925) 7(3.175,-2.925) 8(4.445,-2.925) 9(4.445,2.925) 10(3.175,2.925) 11(1.905,2.925) 12(0.635,2.925) 13(-0.635,2.925) 14(-1.905,2.925) 15(-3.175,2.925) 16(-4.445,2.925)
  silkscreen extent -5.39,-3.05 5,1.75
SO-G16/D10.4 [mm]
  rect 0.6x2.15 smd: 1(-4.445,-4.625) 2(-3.175,-4.625) 3(-1.905,-4.625) 4(-0.635,-4.625) 5(0.635,-4.625) 6(1.905,-4.625) 7(3.175,-4.625) 8(4.445,-4.625) 9(4.445,4.625) 10(3.175,4.625) 11(1.905,4.625) 12(0.635,4.625) 13(-0.635,4.625) 14(-1.905,4.625) 15(-3.175,4.625) 16(-4.445,4.625)
  silkscreen extent -5.42,-4.75 5.2,3.15
"SOT23 - 6" [mm]
  rect 0.5x1 smd: 1(-0.835,-1.337) 2(0.015,-1.337) 3(0.865,-1.337) 4(0.865,1.363) 5(0.015,1.363) 6(-0.835,1.363)
  silkscreen extent -1.48,-0.71 1.52,0.74
SWT-9 [mm]
  rect 1.8x1.8 hole 1.3: 1(0,0)
  round 1.8 hole 1.3: 1(12.5,0) 2(0,-5.08) 2(12.5,-5)
  silkscreen extent 1,-7.5 11.5,2.5
tj3-4p4c [mm]
  round 1.2 hole 0.7: 1(-1.9,0.025) 2(-0.635,2.5) 3(0.635,0) 4(1.9,2.5)
  round 1.2 hole 2.5: 5(-3.8,8.9) 6(3.8,8.9)
  silkscreen extent -7,-1.22 7,15.88
trans_ring1 [mm]
  round 2 hole 1: 1(-35.8,-16.4) 2(-20.15,-22.75) 3(-19.1,-1.8) 4(-19.1,8.65) 5(-19.1,5.05) 6(-19.1,-5.15) 8(-14.1,36.4) 9(-18.2,36.4) 10(-10.6,33.15)
  round 2 hole 1 unplated: 7(-10.6,29.1)
  silkscreen extent -15.24,-15.24 15.24,15.24

## Part data
A1: library part PJEZ0
BT1: "Multicell Battery"
C1 C2 C3 C4 C5 C6 C7 C8 C9 C10 C11 C14 C15 C16 C17 C18 C21 C23 C24 C31 C32 C33 C34 C36 C109 C111 C114 C117: "Capacitor (Semiconductor SIM Model)"
C12 C13 C19 C100 C101 C102 C103 C104 C105 C106 C107 C108: "Polarized Capacitor (Radial)"
C20 C22: "Polarized Capacitor (Surface Mount)"
C26 C27 C28 C29 C30: library part "Cap Semi", "Capacitor (Semiconductor SIM Model)"
C50 C53 C54: "Capacitor"
D1 D2 D6 D7: library part Diode, "Default Diode"
D3 D4 D100 D101 D102 D103 D104 D105 D106: library part 10BQ015, "Schottky Rectifier"
D8 D9: library part "D Zener", "Zener Diode"
J1 J2: "Receptacle Assembly, 9 Position, Right Angle"
JP1: "Header, 13-Pin, Dual row"
JP2 JP3 JP4 JP5: library part "Header 2", "Header, 2-Pin"
JP6 JP8: library part "Header 14H", "Header, 14-Pin, Right Angle"
JP7 JP11: "Header, 5-Pin, Dual row"
JP9: "Header, 14-Pin, Right Angle"
JP10: "Header, 3-Pin"
JP12 JP13: "Header, 4-Pin"
JP14: "Header, 2-Pin"
L1 L100 L101 L102: "Magnetic-Core Inductor"
Q1 Q11: library part GT122
Q2 Q4: library part GT109
Q3 Q5: library part BC847ALT1, "General Purpose Transistor NPN Silicon"
Q100 Q101: "HEXFET N-Channel Power MOSFET"
R1 R2 R3 R4 R5 R6 R7 R8 R9 R10 R11 R12 R13 R14 R15 R16 R17 R18 R19 R20 R21 R22 R23 R24 R25 R26 R27 R28 R29 R30 R31 R32 R33 R34 R35 R36 R37 R38 R39 R40 R41 R42 R43 R44 R45 R46 R47 R48 R49 R52 R53 R56 R57 R63 R64 R65 R72 R73 R74 R75 R79 R80 R81 R82 R89 R90 R97 R100 R101 R102 R103 R104 R105 R106 R107 R108 R109 R110: "Resistor"
S1 S2 S3 S4 S5: library part SWT-9, "Switch"
U1: library part LPC2129FBD64
U4: "8-Channel Analog Multiplexer/Demultiplexer"
U6: "3-Terminal Low-Current Positive Fixed Voltage Regulator"
U10: "Precision Micropower, Low-Dropout, Voltage Reference"
U11: "Quadruple Operational Amplifier"
U12: "Dual Operational Amplifier"
U14: "+5V Powered, Multi-Channel RS-232 Driver/Receiver"
U19 U20: library part LP2980AIM5-3.3, "Micropower SOT, 50 mA Ultra Low-Dropout Regulator"
U24: "ADC"
U100: "Self-Oscillating Half-Bridge Driver"
U101: library part L7805CT, "Positive Voltage Regulator"
U102: "Negative Voltage Regulator"
U103: library part C78L05CD, "CMOS Positive Voltage Regulator Very Low Drop-Very Low Quiescent"
X1 X2 X3 X4 X5 X6 X7 X8 X9 X10 X11 X12 X13 X14 X15 X16 X22 X23 X24 X25 X26 X27 X28 X29 X30 X31 X32 X33 X34 X35 X36 X37 X38 X39 X40 X41 X42 X43 X44 X45 X46 X47: library part Socket, "Socket"
Y1 Y2 Y3: library part XTAL, "Crystal Oscillator"

## Free pads (board coordinates)
  round 5 hole 3.2: 0(5.5,106.5) 0(5.5,4.5) 0(73.5,4.5) 0(73.5,106.5) 0(96.5,106.6) 0(96.5,4.6) 0(156,27.4) 0(156.05,11.6) 0(164.5,4.6) 0(164.5,106.6) 0(224.95,5) 0(225,31.7) 0(225,107.55) 0(225.05,60.05)
  round 3 hole 1.5: 0(106.95,51.5)
  round 2.5 hole 1.3: 1(110.75,55.8) 2(118.15,64.95) 3(103.1,46.95) 4(95.9,37.85)
  round 2 hole 1: 4(4.3,61.75) 9(4.3,57.6) 9(83.2,57.7) 9(83.2,61.85)

## Via types
v1: diameter 1.1, hole 0.6, Top Layer to Bottom Layer, 338 vias
v2: diameter 1.2, hole 0.7, Top Layer to Bottom Layer, 152 vias

## Nets (pads, with @x,y where several pads share a name; then routed paths per layer and width w, separated by ;. In a path a pad name is that pad's centre, name@x,y a point inside that pad or via, vN(x,y) a via of type N, cw(c..) or ccw(c..) an arc to the next point about the centre after c; other vN are vias at no path point)
485RX: JP4.3 JP6.6 | length 8
  Bottom Layer w0.5: JP6.6@60.92,2.76 59.65,4.03 59.65,6.15 61.42,7.92 JP4.3@61.42,9.5
485TX: JP4.2 JP6.5 | length 5.5
  Bottom Layer w0.5: JP6.5@60.92,5.3 63.96,8.34 JP4.2@63.96,9.5
+1V8: C14.2 C32.2 U1.17 U1.49 U1.63 U20.5 | length 51
  Top Layer w1: v1(51.4,88.9) 55.8,84.5 55.8,83.75 v1(52,79.95) ; v1(55.8,84.05) v1(65.5,84.05)
  Bottom Layer w0.25: U1.17@50.274,77.571 52,79.297 v1(52,79.95) ; v1(51.4,88.9) 51.4,89.303 U1.49@52.926,90.829 ; v1(55.8,84.05) 56.046,84.05 U1.63@57.876,85.879
  Bottom Layer w1: U20.5@65.4,104.45 65.4,84.15 v1(65.5,84.05)
+3V3: 
+3V3: C33.2 U1.7 U1.23 U1.43 U1.51 U17.5 X38.1 | length 95.2
  Top Layer w0.4: v1(51.65,75.75) 54.05,73.35 65.8,73.35 66.1,73.05 71,73.05 71.45,73.5 76.85,73.5 v1(76.9,73.45) ; v1@72.7,81.9 77.35,81.9 v1(78.15,81.1)
  Top Layer w1: v1(49.65,87.9) 50.4,87.9 51.225,87.075 52.95,85.35 52.95,83.75 51.2,82 v1@50.5,82 ; v1(50.5,82.05) 50.5,77.8 51.65,76.65 v1(51.65,75.75) v1@51.7,75.75
  Bottom Layer w0.25: U1.23@48.153,79.692 50.5,82.039 v1(50.5,82.05) ; U1.43@48.506,89.061 49.65,87.918 v1(49.65,87.9) ; v1@51,86.95 51.2,87.15 52.5,88.45 52.5,88.989 U1.51@53.633,90.122 ; v1@52.9,83.95 v1(52.911,83.95) U1.7@56.108,80.753
  Bottom Layer w0.4: U17.5@72.685,80.663 72.685,81.835 v1(72.75,81.9) ; v1(76.9,73.45) 77.9,74.45 77.9,80.85 v1(78.15,81.1)
  Bottom Layer w0.8: X38.1@48,53.6 48,59.7 51.65,63.35 v1(51.65,75.75)
  other v1: 51.25,87.1
+3V3_: C17.2 U15.1 U19.5 X41.1 | length 17.4
  Top Layer w0.5: v1(41.1,11.6) 42.2,10.5 53.15,10.5 53.85,9.8 v1(53.85,9.55)
  Bottom Layer w0.5: U15.1@38.8,11.605 41.095,11.605 v1(41.1,11.6) ; U19.5@53.1,10.55 53.1,10.3 v1(53.85,9.55)